# Altium PCB Power_board.PcbDoc
Units mm, origin at the board's own origin, x right, y up, seen from the top; angles counter-clockwise.
Board outline 44.5 x 82.78 mm, 2 copper layers (Top Layer, Bottom Layer), stack 1.58 mm thick; 25 components, 12 nets, 77 pads, 201 vias.
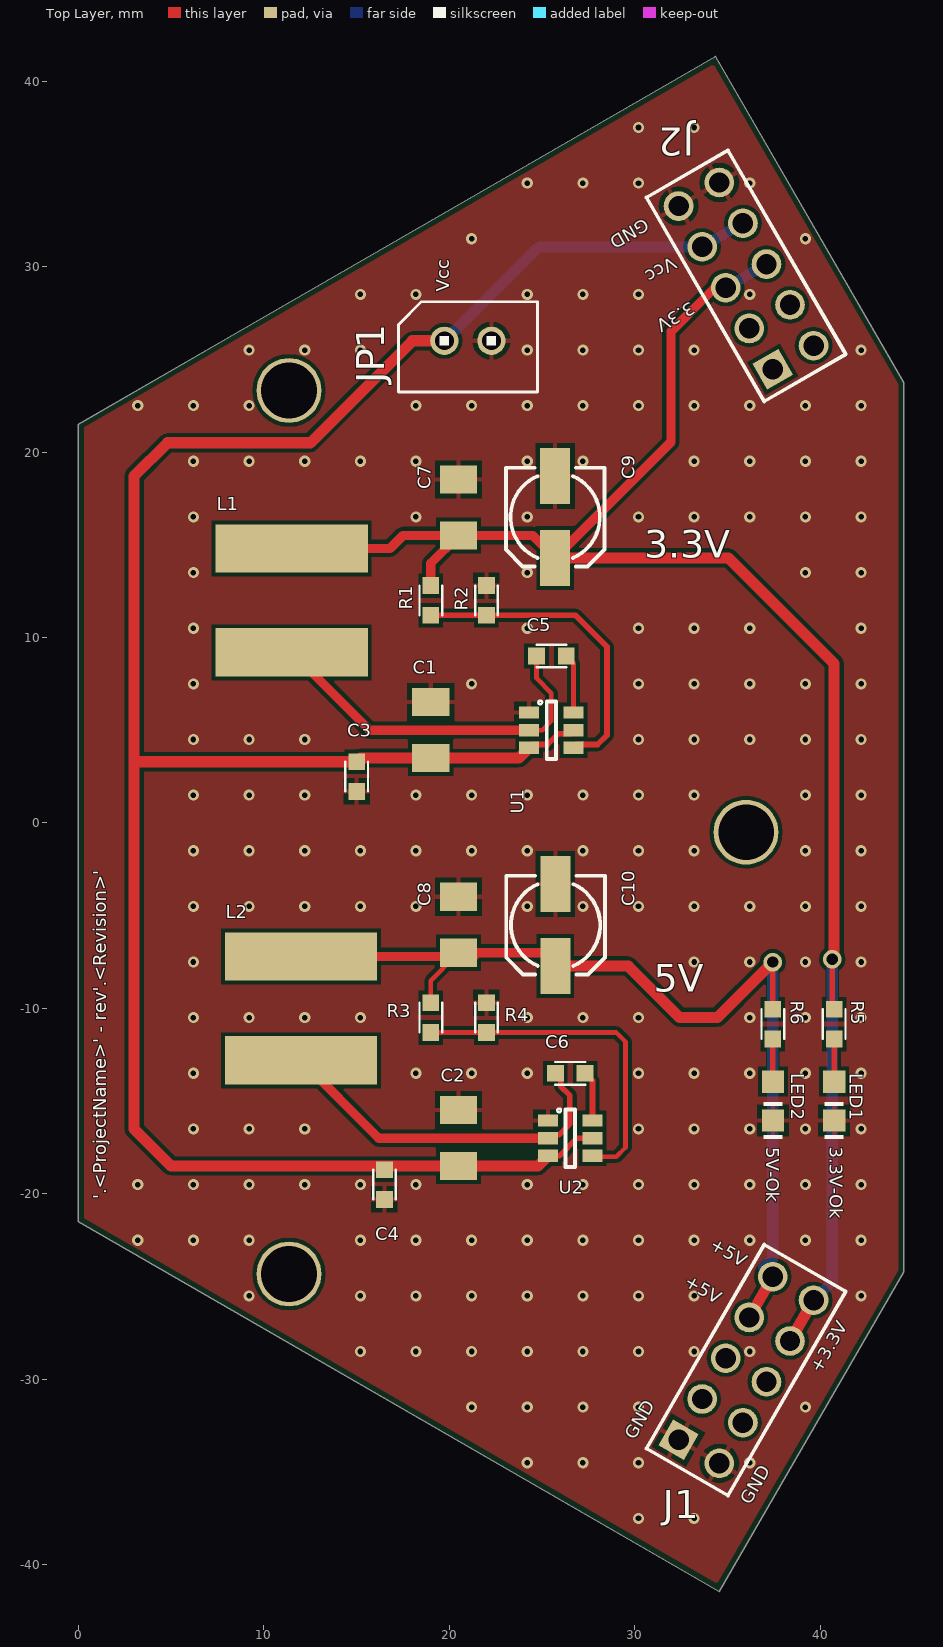
[diagram p0: Top Layer view]
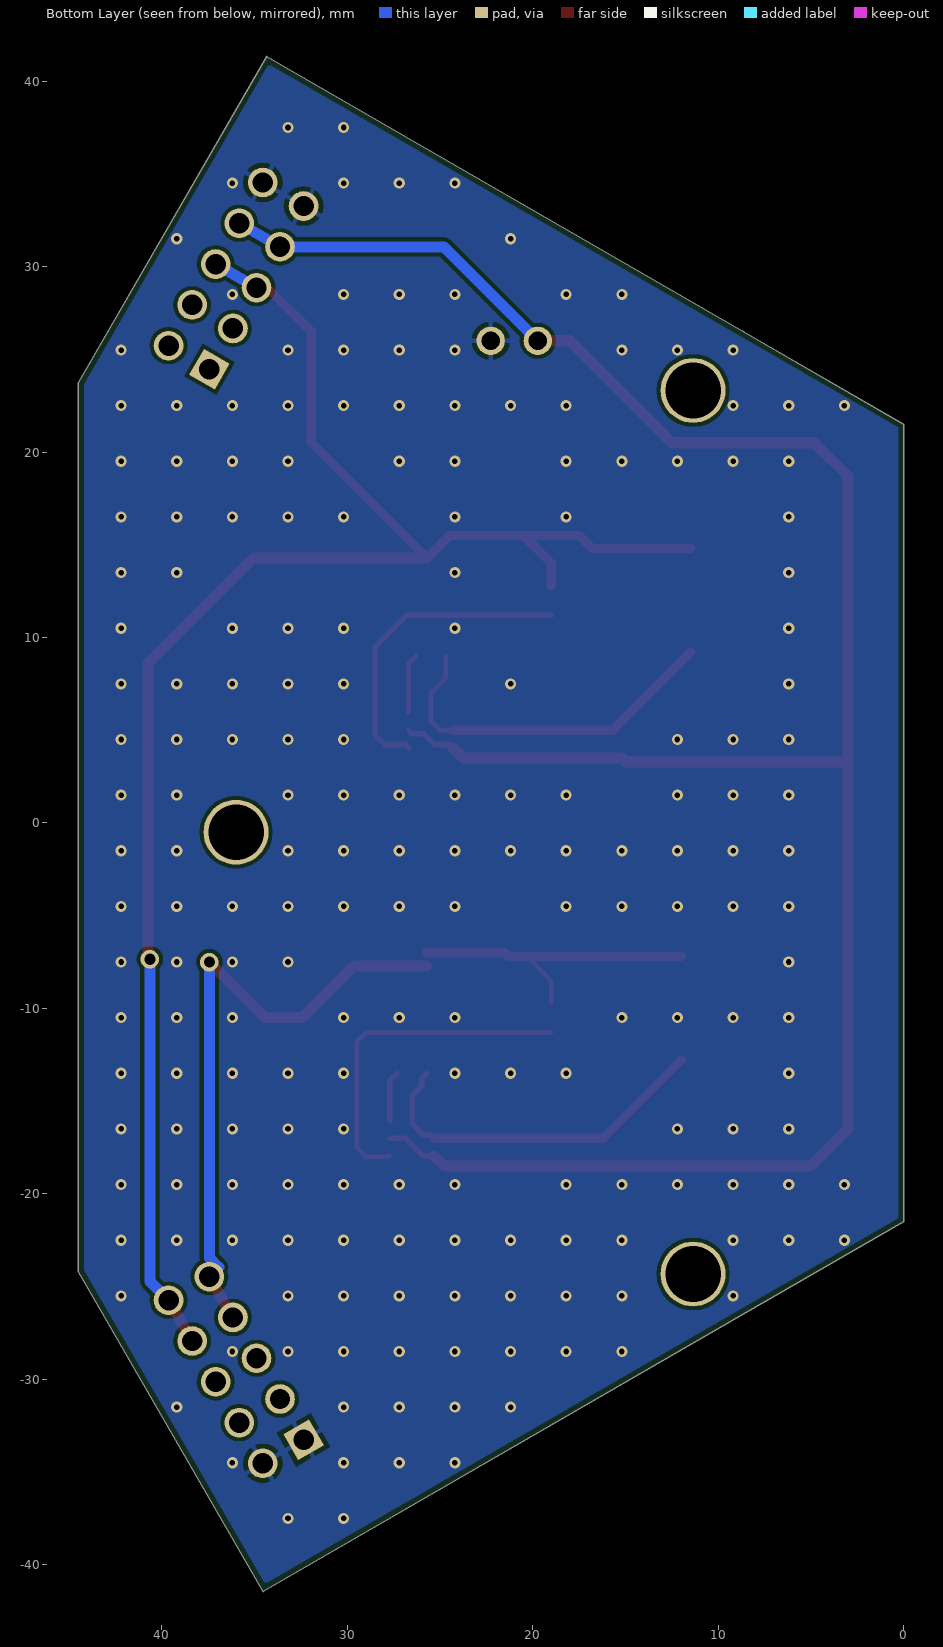
[diagram p1: Bottom Layer view, seen from below]
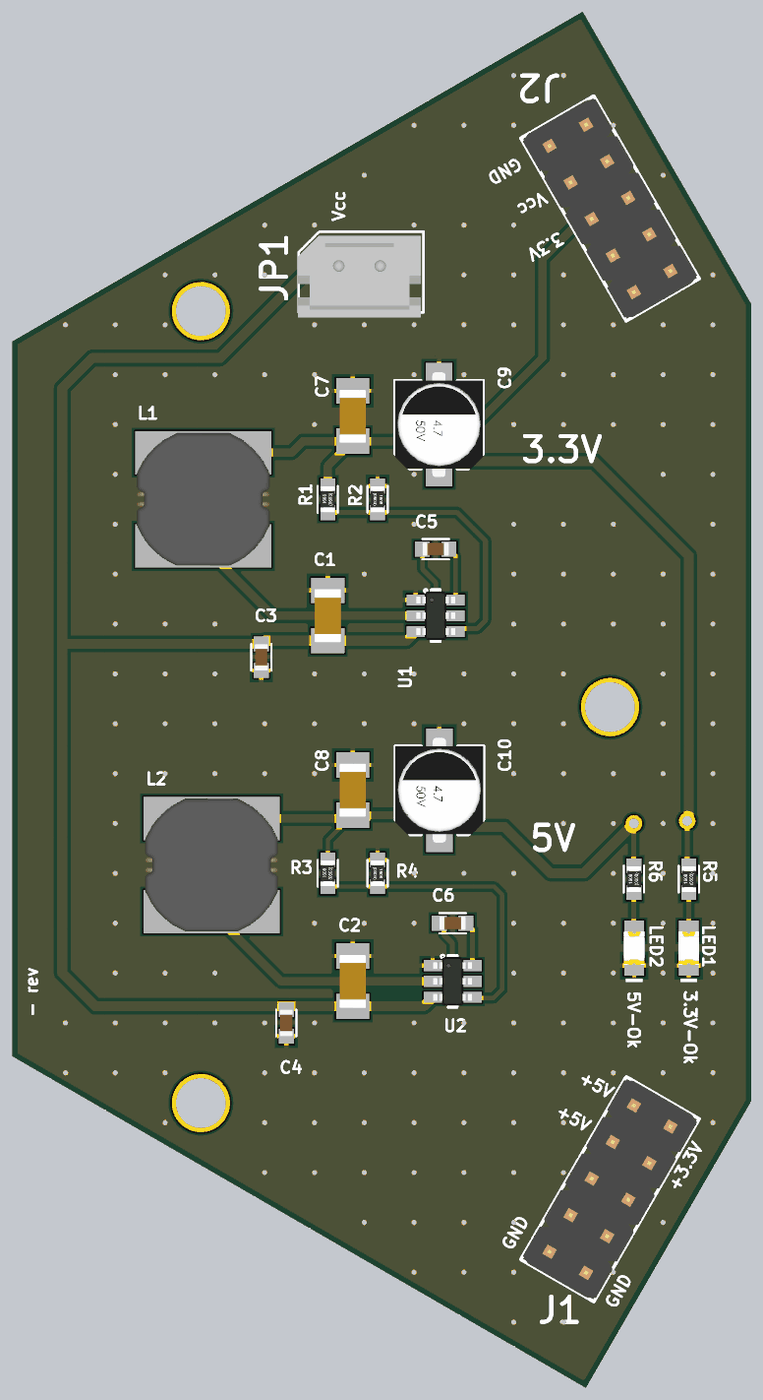
[diagram p2: 3D render of the assembled board from above, using the file's embedded part models]

## Layer stack, top to bottom
Top Solder: solder mask 0.0102, Solder Resist, Dk 3.5
Top Layer: signal copper 0.0356
Dielectric 1: dielectric 1.5086, FR-4, Dk 4.8
Bottom Layer: signal copper 0.0356
Bottom Solder: solder mask 0.0102, Solder Resist, Dk 3.5

## Board outline
0,-21.5 0,21.5 8.66,26.5 34.349,41.331 44.5,23.749 44.5,-24.205 34.547,-41.446 8.66,-26.5

## Design rules (kind name [scope] priority, off if disabled: settings)
BoardOutlineClearance [All xor (OnLayer('Top Overlay') or OnLayer('Bottom Overlay'))] p1: gap=0.25 ignorepadtopadclearanceinfootprint=FALSE except(0: Arc-SplitContinuation Track-SplitContinuation SMDPad-SplitContinuation THPad-SplitContinuation Via-SplitContinuation Fill-SplitContinuation Poly-SplitContinuation Region-SplitContinuation Text-SplitContinuation; 0.3: Poly-OutlineEdge)
Clearance [All] p1: gap=0.2 ignorepadtopadclearanceinfootprint=TRUE except(0: Arc-Hole Track-Hole SMDPad-Text SMDPad-Hole THPad-Hole Via-Hole Fill-Hole Poly-Hole Region-Hole Text-Hole; 0.19: Arc-SMDPad Track-SMDPad SMDPad-SMDPad; 0.25: Arc-THPad Arc-Via Arc-Text Track-THPad Track-Via Track-Text SMDPad-THPad SMDPad-Via THPad-THPad THPad-Via THPad-Text Via-Via Via-Text Fill-Text Poly-Text Region-Text Text-Text)
ComponentClearance [All] p1: gap=0 collisioncheckmode=3 verticalgap=0 showdistances=FALSE
HoleSize [All] p1: absolutevalues=TRUE maxlimit=3 minlimit=0.025 maxpercent=80.000 minpercent=20.000
MinimumSolderMaskSliver [All] p1: minsoldermaskwidth=0.06
PlaneConnect [All] p1: planeconnectstyle=Direct reliefexpansion=0.508 reliefentries=4 reliefconductorwidth=0.254 reliefairgap=0.254
PolygonConnect PolygonConnect_via [All vs IsVia] p1: connectstyle=Direct reliefconductorwidth=0.254 reliefentries=4 polygonreliefangle="90 Angle" airgapwidth=0.254
PolygonConnect [All] p2: connectstyle=Relief reliefconductorwidth=0.254 reliefentries=4 polygonreliefangle="90 Angle" airgapwidth=0.254
RoutingVias [All] p1: holewidth=0.9 width=1.5 viastyle="Through Hole" minholewidth=0.3 minwidth=0.6 maxholewidth=0.6 maxwidth=1
SilkToSilkClearance [All] p1: silktosilkclearance=0.03
SilkToSolderMaskClearance [IsPad] p1: minsilkscreentomaskgap=0.025 clearancetoexposedcopper=TRUE
SolderMaskExpansion [All] p1: expansion=0.102
Width Width_Antenna [InNet('LNA_IN')] p1: maxlimit=3.2 minlimit=0.3 preferedwidth=1.2
Width Width_AC_Power [InNetClass('ACPowerNets')] p2: maxlimit=3.2 minlimit=0.5 preferedwidth=1.7
Width Width_DC_Power [InNetClass('DCPowerNets')] p3: maxlimit=1 minlimit=0.25 preferedwidth=0.5
Width [All] p4: maxlimit=0.6 minlimit=0.25 preferedwidth=0.4
24 further rules are at their usual default settings.

## Components (designator, comment, footprint, x,y, rotation, side; value= is the part's Value field where it differs from the comment)
C1 "Ceramic capacitor" C1206K 19,5 r90 top value=22uF
C2 "Ceramic capacitor" C1206K 20.5,-17 r90 top value=22uF
C3 "C-EUC0603" C0603 15,2.5 r270 top value=100nF
C4 "C-EUC0603" C0603 16.5,-19.5 r270 top value=100nF
C5 "C-EUC0603" C0603 25.5,9 r180 top value=100nF
C6 "C-EUC0603" C0603 26.52,-13.5 r180 top value=100nF
C7 "Capacitor" C1206K 20.5,17 r90 top value=47uF
C8 "Capacitor" C1206K 20.5,-5.5 r90 top value=47uF
C9 "" 153CLV-0505 25.7,16.5 r270 top value=100uF
C10 "" 153CLV-0505 25.72,-5.5 r270 top value=100uF
J1 "10p" 61301021121 36,-29.5 r60 top
J2 "10p" 61301021121 36,29.5 r120 top
JP1 "CONECT_BAT" CONECT_BAT_PCK 21,26 r0 top
L1 "SRN8040" SRN8040 11.5,12 r90 top value=2.2uH
L2 "SRN8040" SRN8040 12,-10 r90 top value=3.3uH
LED1 "LEDCHIPLED_0805" CHIPLED_0805 40.75,-15 r180 top
LED2 "LEDCHIPLED_0805" CHIPLED_0805 37.457,-15 r180 top
R1 "33.2k" R0603 19,12 r90 top
R2 "10k" R0603 22,12 r270 top
R3 "56.2k" R0603 19,-10.5 r90 top
R4 "10k" R0603 22,-10.5 r270 top
R5 "" R0603 40.75,-10.848 r90 top value=470
R6 "" R0603 37.44,-10.848 r90 top value=470
U1 "TPS563200" DBV0006A_N 25.5,5 r0 top
U2 "TPS563200" DBV0006A_N 26.52,-17 r0 top

## Footprints (in the part's own frame and the unit in brackets; to place one, negate y for a bottom-side part, rotate by r counter-clockwise, add the part's x,y. Pads: shape width x height; smd on the part's side, far side on the other; paste and mask are expansions set on the pad)
153CLV-0505 [mil]
  rect 119x63 smd: +(87,0) -(-86.61,0)
  silkscreen extent -104,-104 105,105, body extent -124,-104 124,104, height 224
61301021121 [mm] "10 pins, dual pin, straight, gold plating"
  rect 1.6x1.6 hole 1.1: 1(-5.08,1.27)
  round 1.6 hole 1.1: 2(-2.54,1.27) 3(0,1.27) 4(2.54,1.27) 5(5.08,1.27) 6(-5.08,-1.27) 7(-2.54,-1.27) 8(0,-1.27) 9(2.54,-1.27) 10(5.08,-1.27)
  silkscreen extent -6.35,-2.54 6.35,2.54, body extent -6.35,-2.54 6.35,2.54, height 8.57
C0603 [mm]
  rect 0.9x0.9 smd: 1(-0.8,0) 2(0.8,0)
  silkscreen extent -0.8,-0.61 0.8,0.61, body extent -0.8,-0.4 0.8,0.4, height 0.8
C1206K [mil]
  rect 60x79 smd: 1(-59.06,0) 2(60,0)
  body extent -63,-31 63,31, height 39
CHIPLED_0805 [mm]
  rect 1.2x1.2 smd: A(0,-1.05) C(0,1.05)
  silkscreen extent -0.51,0.05 0.51,2.03, body extent -0.63,-1 0.62,1, height 0.81
CONECT_BAT_PCK [mil]
  round 60 hole 40: 1(50,0) 2(-50,0)
  silkscreen extent -148,-109 148,83, body extent -149,-120 142,72, height 234
DBV0006A_N [mil]
  rect 43x26 smd: 1(-47.24,37.4) 2(-47.24,0) 3(-47.24,-37.4) 4(47.24,-37.4) 5(47.24,0) 6(47.24,37.4)
  silkscreen extent -28,-61 10,63, body extent -46,-57 46,57, height 39
R0603 [mm]
  rect 0.9x0.9 smd: 1(-0.8,0) 2(0.8,0)
  silkscreen extent -0.8,-0.61 0.8,0.61, body extent -0.77,-0.42 0.78,0.43, height 0.45
SRN8040 [mm] "Semi-shielded Power Inductors"
  rect 2.6x8.2 smd: 1(-2.8,0) 2(2.8,0)
  body extent -4,-4.01 4,4.01, height 4

## Part data
C1 C2: library part C-EUC1206K, "CAPACITOR, European symbol", Part Number=GRM31CR61E226ME15K, Família=Capacitor, Vendor=Murata
C3 C4 C5 C6: Part Number=06033C104KAT2A, Família=Capacitor, Vendor=AVX
C7 C8: library part C-EUC1206K, "CAPACITOR, European symbol", Part Number=GRM31CR61A476KE15L, Família=Capacitor, Vendor=Murata
C9 C10: library part CPOL-US153CLV-0505, Part Number=UWR1A101MCL1GB, Família=Capacitor, Vendor=Nichicon
J1 J2: library part 61301021121, "WR-PHD 2.54 mm THT Dual Pin Header, 10p", Part Number=61301021121, Vendor="Wurth Elektronik"
L1: "Imported", Part Number=SRN8040-2R2Y, Família=Indutor, Vendor=Bourns
L2: "Imported", Part Number=SRN8040-3R3Y, Família=Indutor, Vendor=Bourns
R1: library part R-US_R0603, "RESISTOR, American symbol", Part Number=RR0816P-3322-D-51C, Família=Resistor, Vendor=Susumu
R2 R4: library part R-US_R0603, "RESISTOR, American symbol", Part Number=RC0603FR-0710KL, Família=Resistor, Vendor=Yageo
R3: library part R-US_R0603, "RESISTOR, American symbol", Part Number=RR0816P-5622-D-73C, Família=Resistor, Vendor=Susumu
R5 R6: library part R-US_R0603, "RESISTOR, American symbol", Part Number=ERJ-3GEYJ471V, Família=Resistor, Vendor=Panasonic
U1 U2: Part Number=TPS563200DDCR, Família=Cis, Vendor="Texas Instruments"

## Free pads (board coordinates)
  round 3.5 hole 3: ""(11.356,-24.322) ""(11.356,23.322) ""(36,-0.5)

## Via types
v1: diameter 0.6, hole 0.3, Top Layer to Bottom Layer, tented both sides, 199 vias
v2: diameter 1, hole 0.6, Top Layer to Bottom Layer, 2 vias

## Nets (pads, with @x,y where several pads share a name; then routed paths per layer and width w, separated by ;. In a path a pad name is that pad's centre, name@x,y a point inside that pad or via, vN(x,y) a via of type N, cw(c..) or ccw(c..) an arc to the next point about the centre after c; other vN are vias at no path point)
+3V3: C7.1 C9.+ J1.9 J1.10 J2.3 J2.8 L1.2 R1.2 R5.2 | length 97
  Top Layer w0.3: v2(40.648,-7.349) 40.648,-9.946 R5.2
  Top Layer w0.5: L1.2 16.8,14.8 17.5,15.5 C7.1 ; R1.2 19,14 C7.1 ; J2.3 34.312,28.865 31.947,26.5 31.947,20.537 C9.+ 24.49,15.5 C7.1
  Top Layer w0.6: C9.+ 35.06,14.29 40.75,8.6 v2@40.75,-7.349 ; J1.9 J1.10
  Bottom Layer w0.6: J2.3 J2.8 ; J1.10 40.648,-24.727 v2(40.648,-7.349)
+5V: C8.1 C10.+ J1.4 J1.5 L2.2 R3.2 R6.2 | length 53.4
  Top Layer w0.25: R3.2 19,-8.5 C8.1@20.3,-7.2
  Top Layer w0.3: R6.2 v2(37.44,-7.5)
  Top Layer w0.5: L2.2 20.3,-7.2 21.3,-7.2 21.5,-7 C10.+@25.72,-7
  Top Layer w0.6: C10.+ 29.646,-7.71 32.423,-10.487 34.453,-10.487 v2(37.44,-7.5) ; J1.4 J1.5
  Bottom Layer w0.6: J1.5 36.936,-23.961 37.44,-23.457 v2(37.44,-7.5)
+12V: C1.1 C2.1 C3.1 C4.1 J2.4 J2.9 JP1.2 U1.3 U1.5 U2.3 U2.5 | length 124.1
  Top Layer w0.3: U1.3 24.48,4.23 25.296,4.23 25.886,4.82 26.52,4.82 U1.5 ; U2.3 25.93,-17.95 26.88,-17 U2.5
  Top Layer w0.6: JP1.2 18,26 12.5,20.5 4.8,20.5 3,18.7 3,3.3 ; U1.3 23.75,3.5 C1.1 15.2,3.5 C3.1 3,3.3 ; U2.3 24.77,-18.5 C2.1 5,-18.5 3,-16.5 3,3.3
  Bottom Layer w0.6: JP1.2 24.795,31.065 J2.4 J2.9
GND: C1.2 C2.2 C3.2 C4.2 C7.2 C8.2 C9.- C10.- J1.1 J1.6 J2.5 J2.10 JP1.1 LED1.C LED2.C R2.1 R4.1 U1.1 U2.1
  other v1: 30.2,-37.5 33.2,-37.5 24.2,-34.5 27.2,-34.5 30.2,-34.5 36.2,-34.5 21.2,-31.5 24.2,-31.5 27.2,-31.5 30.2,-31.5 39.2,-31.5 15.2,-28.5 18.2,-28.5 21.2,-28.5 24.2,-28.5 27.2,-28.5 30.2,-28.5 33.2,-28.5 36.2,-28.5 9.2,-25.5 15.2,-25.5 18.2,-25.5 21.2,-25.5 24.2,-25.5 27.2,-25.5 30.2,-25.5 33.2,-25.5 42.2,-25.5 3.2,-22.5 6.2,-22.5 9.2,-22.5 15.2,-22.5 18.2,-22.5 21.2,-22.5 24.2,-22.5 27.2,-22.5 30.2,-22.5 33.2,-22.5 36.2,-22.5 39.2,-22.5 42.2,-22.5 3.2,-19.5 6.2,-19.5 9.2,-19.5 12.2,-19.5 15.2,-19.5 18.2,-19.5 24.2,-19.5 27.2,-19.5 30.2,-19.5 33.2,-19.5 36.2,-19.5 39.2,-19.5 42.2,-19.5 6.2,-16.5 9.2,-16.5 12.2,-16.5 30.2,-16.5 33.2,-16.5 36.2,-16.5 39.2,-16.5 42.2,-16.5 6.2,-13.5 18.2,-13.5 21.2,-13.5 24.2,-13.5 30.2,-13.5 33.2,-13.5 36.2,-13.5 39.2,-13.5 42.2,-13.5 6.2,-10.5 9.2,-10.5 12.2,-10.5 15.2,-10.5 24.2,-10.5 27.2,-10.5 30.2,-10.5 36.2,-10.5 39.2,-10.5 42.2,-10.5 6.2,-7.5 33.2,-7.5 36.2,-7.5 39.2,-7.5 42.2,-7.5 6.2,-4.5 9.2,-4.5 12.2,-4.5 15.2,-4.5 18.2,-4.5 24.2,-4.5 27.2,-4.5 30.2,-4.5 33.2,-4.5 36.2,-4.5 39.2,-4.5 42.2,-4.5 6.2,-1.5 9.2,-1.5 12.2,-1.5 15.2,-1.5 18.2,-1.5 21.2,-1.5 24.2,-1.5 27.2,-1.5 30.2,-1.5 33.2,-1.5 39.2,-1.5 42.2,-1.5 6.2,1.5 9.2,1.5 12.2,1.5 18.2,1.5 21.2,1.5 24.2,1.5 27.2,1.5 30.2,1.5 33.2,1.5 39.2,1.5 42.2,1.5 6.2,4.5 9.2,4.5 12.2,4.5 30.2,4.5 33.2,4.5 36.2,4.5 39.2,4.5 42.2,4.5 6.2,7.5 21.2,7.5 30.2,7.5 33.2,7.5 36.2,7.5 39.2,7.5 42.2,7.5 6.2,10.5 24.2,10.5 30.2,10.5 33.2,10.5 36.2,10.5 42.2,10.5 6.2,13.5 24.2,13.5 39.2,13.5 42.2,13.5 6.2,16.5 18.2,16.5 24.2,16.5 30.2,16.5 33.2,16.5 36.2,16.5 39.2,16.5 42.2,16.5 6.2,19.5 9.2,19.5 12.2,19.5 15.2,19.5 18.2,19.5 24.2,19.5 27.2,19.5 33.2,19.5 36.2,19.5 39.2,19.5 42.2,19.5 3.2,22.5 6.2,22.5 9.2,22.5 18.2,22.5 21.2,22.5 24.2,22.5 27.2,22.5 30.2,22.5 33.2,22.5 36.2,22.5 39.2,22.5 42.2,22.5 9.2,25.5 12.2,25.5 15.2,25.5 24.2,25.5 27.2,25.5 30.2,25.5 33.2,25.5 42.2,25.5 15.2,28.5 18.2,28.5 24.2,28.5 27.2,28.5 30.2,28.5 36.2,28.5 21.2,31.5 39.2,31.5 24.2,34.5 27.2,34.5 30.2,34.5 36.2,34.5 30.2,37.5 33.2,37.5
NetC5_1: C5.1 U1.6 | length 3.2
  Top Layer w0.254: C5.1 26.7,8.6 U1.6
NetC5_2: C5.2 L1.1 U1.2 | length 19.8
  Top Layer w0.254: U1.2 25,5 25.5,5.5 25.5,7 24.7,7.8 C5.2
  Top Layer w0.5: L1.1 15.7,5 U1.2
NetC6_1: C6.1 U2.6 | length 2.7
  Top Layer w0.3: C6.1 27.72,-13.9 U2.6
NetC6_2: C6.2 L2.1 U2.2 | length 19.6
  Top Layer w0.3: U2.2 25.5,-16.82 25.907,-16.82 26.5,-16.227 26.5,-14.7 26,-14.2 26,-13.78 C6.2
  Top Layer w0.5: L2.1 16.2,-17 U2.2
NetLED1_A: LED1.A R5.1 | length 2.3
  Top Layer w0.3: LED1.A R5.1
NetLED2_A: LED2.A R6.1 | length 2.3
  Top Layer w0.3: R6.1 37.44,-13.933 LED2.A
NetR1_1: R1.1 R2.2 U1.4 | length 17.1
  Top Layer w0.3: R1.1 R2.2 26.8,11.2 28.5,9.5 28.5,4.73 28,4.23 26.88,4.23 U1.4
NetR3_1: R3.1 R4.2 U2.4 | length 18.4
  Top Layer w0.25: R3.1 R4.2 29,-11.3 29.5,-11.8 29.5,-17.5 29,-18 27.77,-18 U2.4
pads on no net: J1.2 J1.3 J1.7 J1.8 J2.1 J2.2 J2.6 J2.7

## Polygon pours and split planes (outlines as drawn)
GND on Top Layer "GND" (solid, pour order 4): 0,21.5 0,-21.5 34.56,-41.5 44.5,-24.322 44.5,24 34.45,41.5
GND on Bottom Layer "GND" (solid, pour order 8): 0,21.5 0,-21.5 34.56,-41.5 44.5,-24.322 44.5,24 34.45,41.5

## Silkscreen, mask and mechanical layers (free items; w line width, h text height)
Top Overlay:
  text "GND" at 30.5,32.631 h0.7 r210
  text "Vcc" at 32,30.56 h0.7 r210
  text "Vcc" at 20,28.649 h0.7 r90
  text "3.3V" at 33,28.125 h0.7 r210
  text "3.3V" at 30.5,14.29 h1.5
  text "5V" at 31.034,-9.098 h1.5
  text "3.3V-Ok" at 40.5,-17.459 h0.7 r270
  text "5V-Ok" at 37.1,-17.5 h0.7 r270
  text "'.<ProjectName>' - rev'.<Revision>'" at 1.5,-20.3 h0.7 r90
  text "+5V" at 34,-22.936 h0.7 r330
  text "+5V" at 32.626,-24.936 h0.7 r330
  text "+3.3V" at 40,-29.738 h0.7 r60
  text "GND" at 30,-33.309 h0.7 r60
  text "GND" at 36.226,-36.809 h0.7 r60
Outline:
  the board outline again, w0.127
Mechanical 4:
  lines w0.254: -35.9,14.8 -34,14.8